# Altium PCB PCB10X10.PcbDoc
Units mm, origin at the board's own origin, x right, y up, seen from the top; angles counter-clockwise.
Board outline 100 x 100 mm, 2 copper layers (Top Layer, Bottom Layer); 43 components, 32 nets, 154 pads, 19 vias.
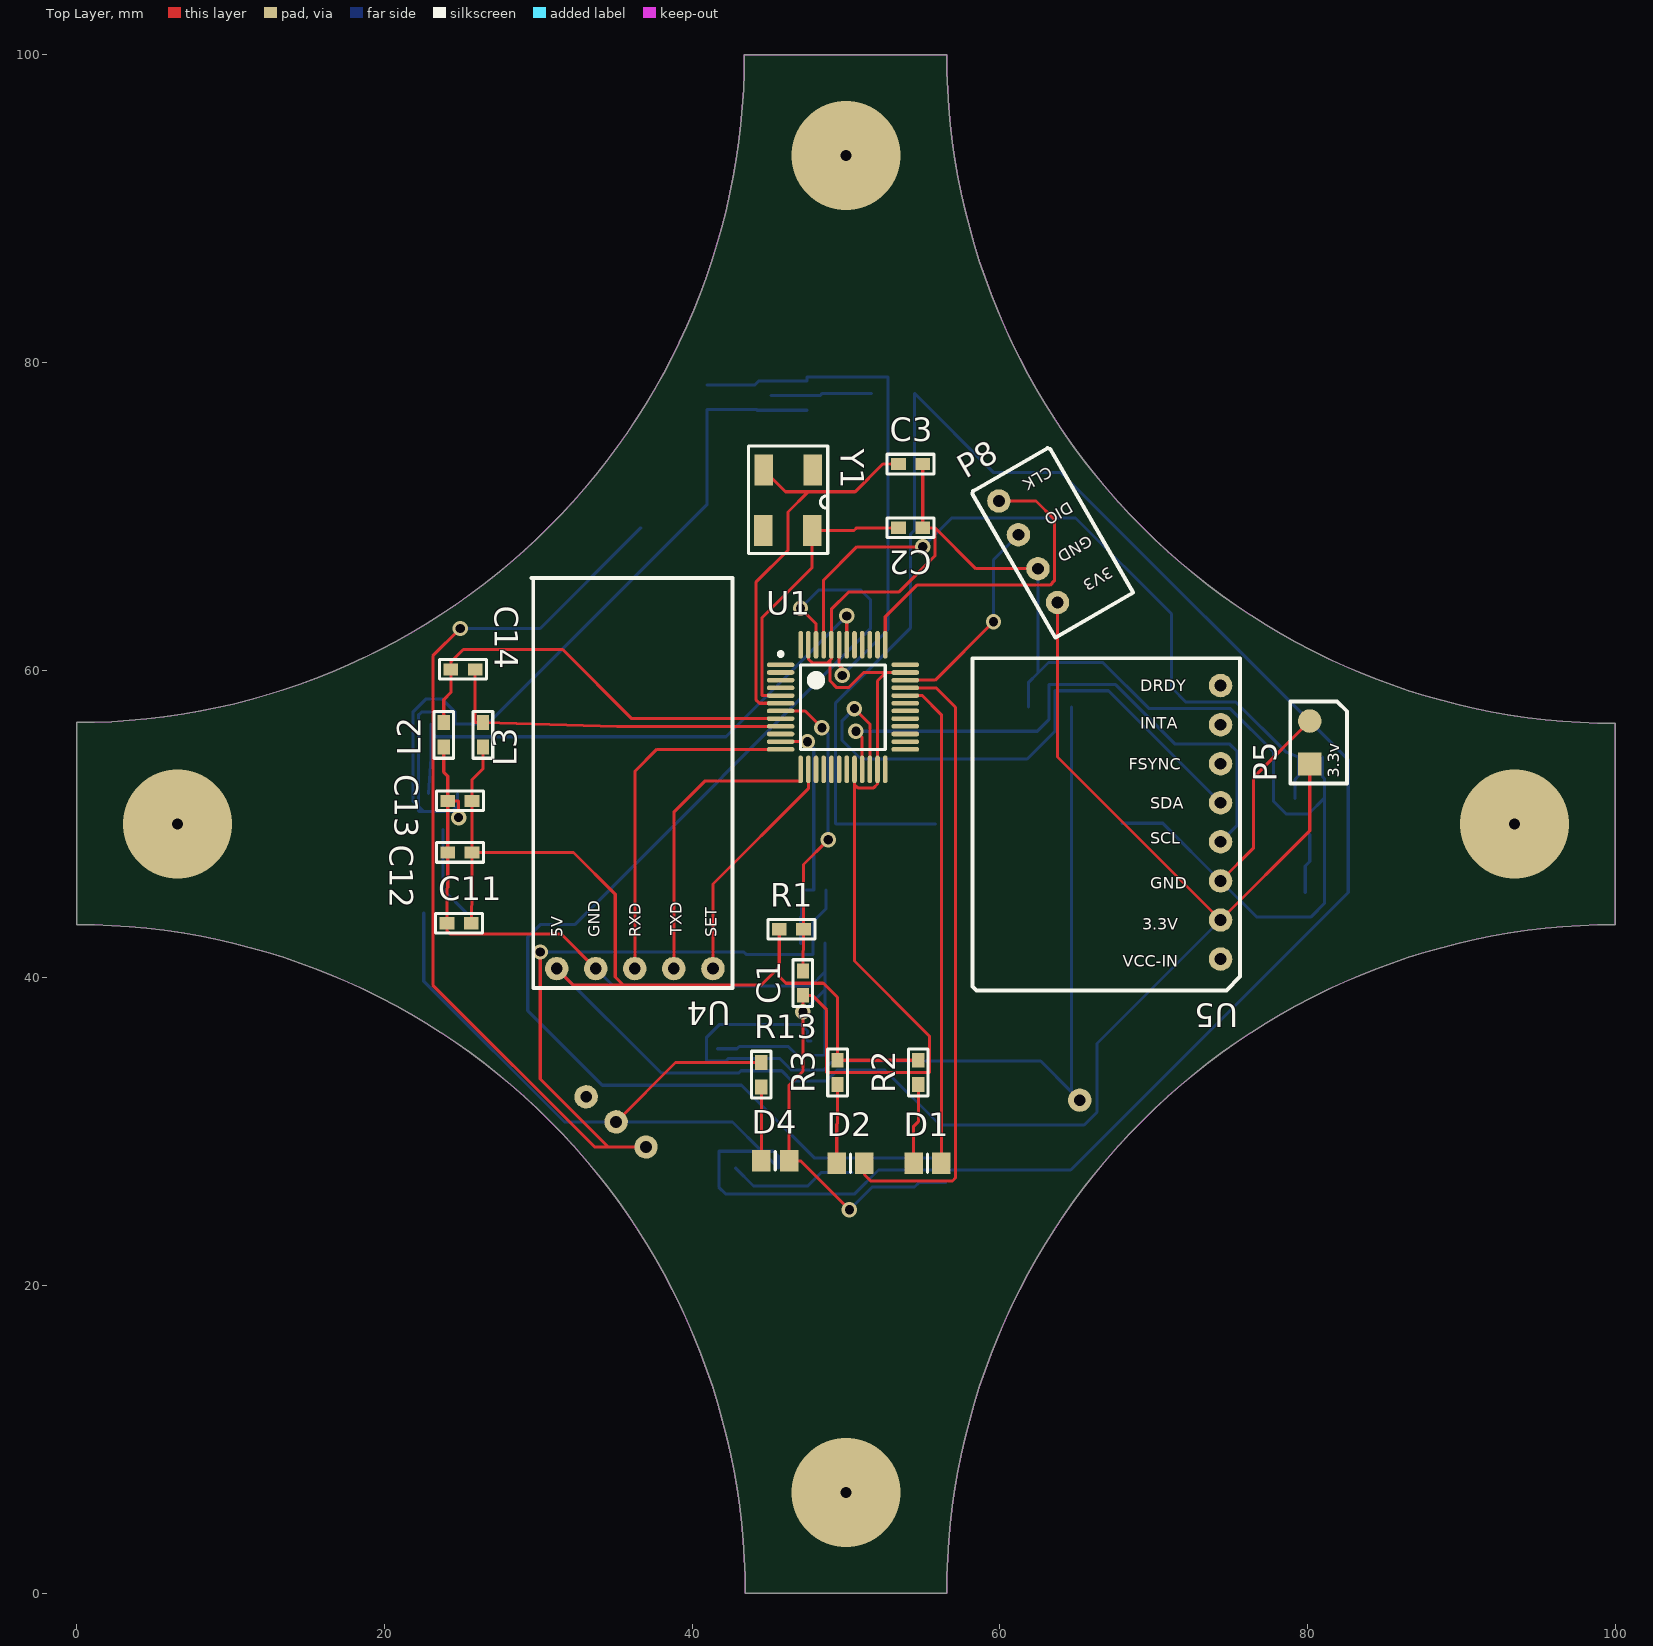
[diagram p0: Top Layer view]
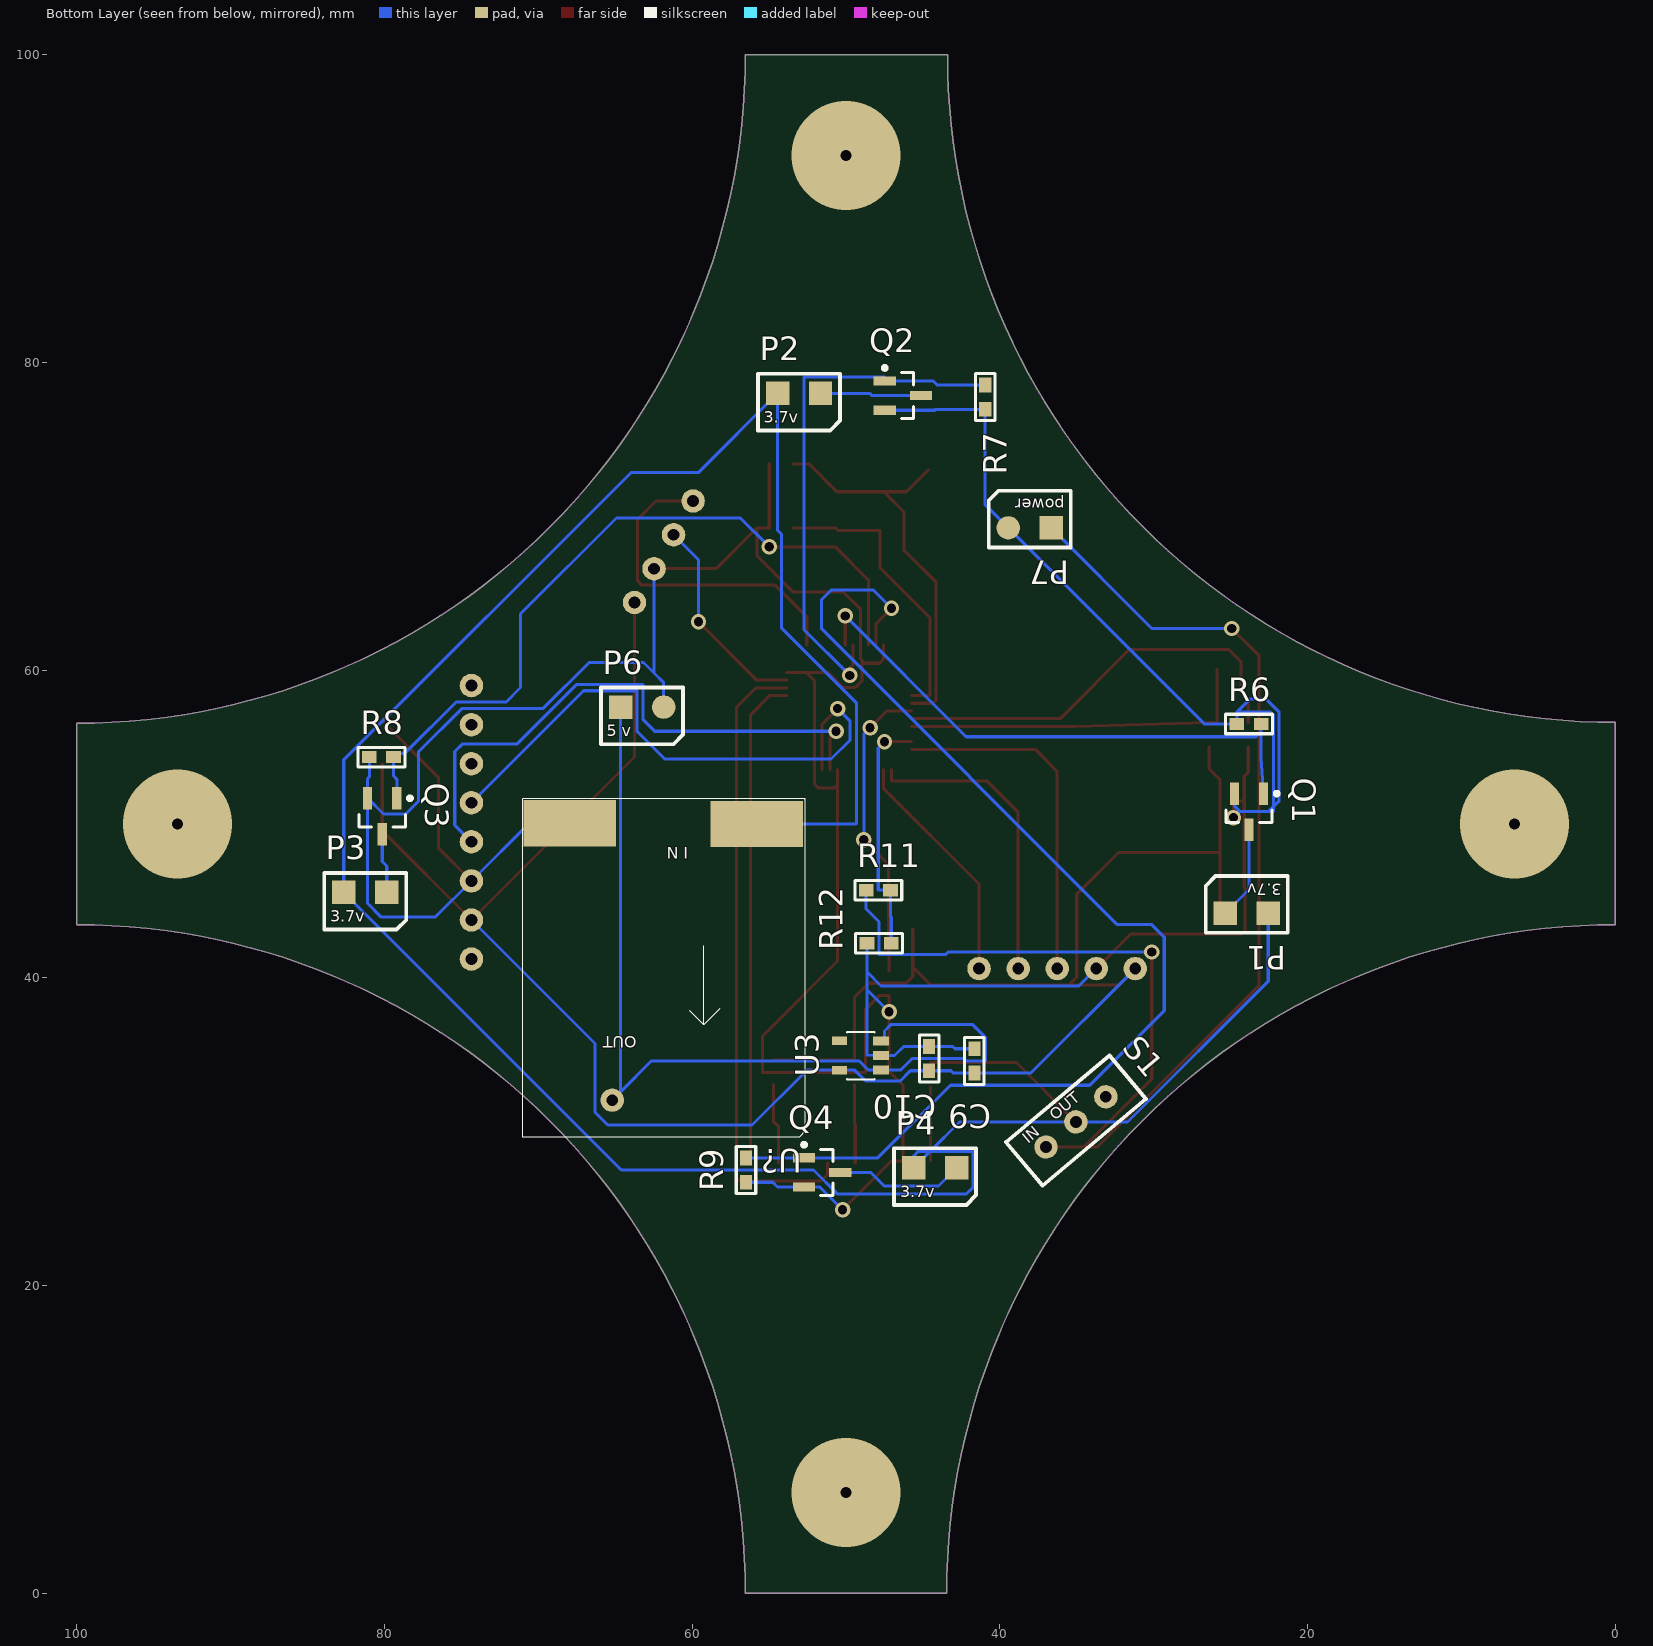
[diagram p1: Bottom Layer view, seen from below]
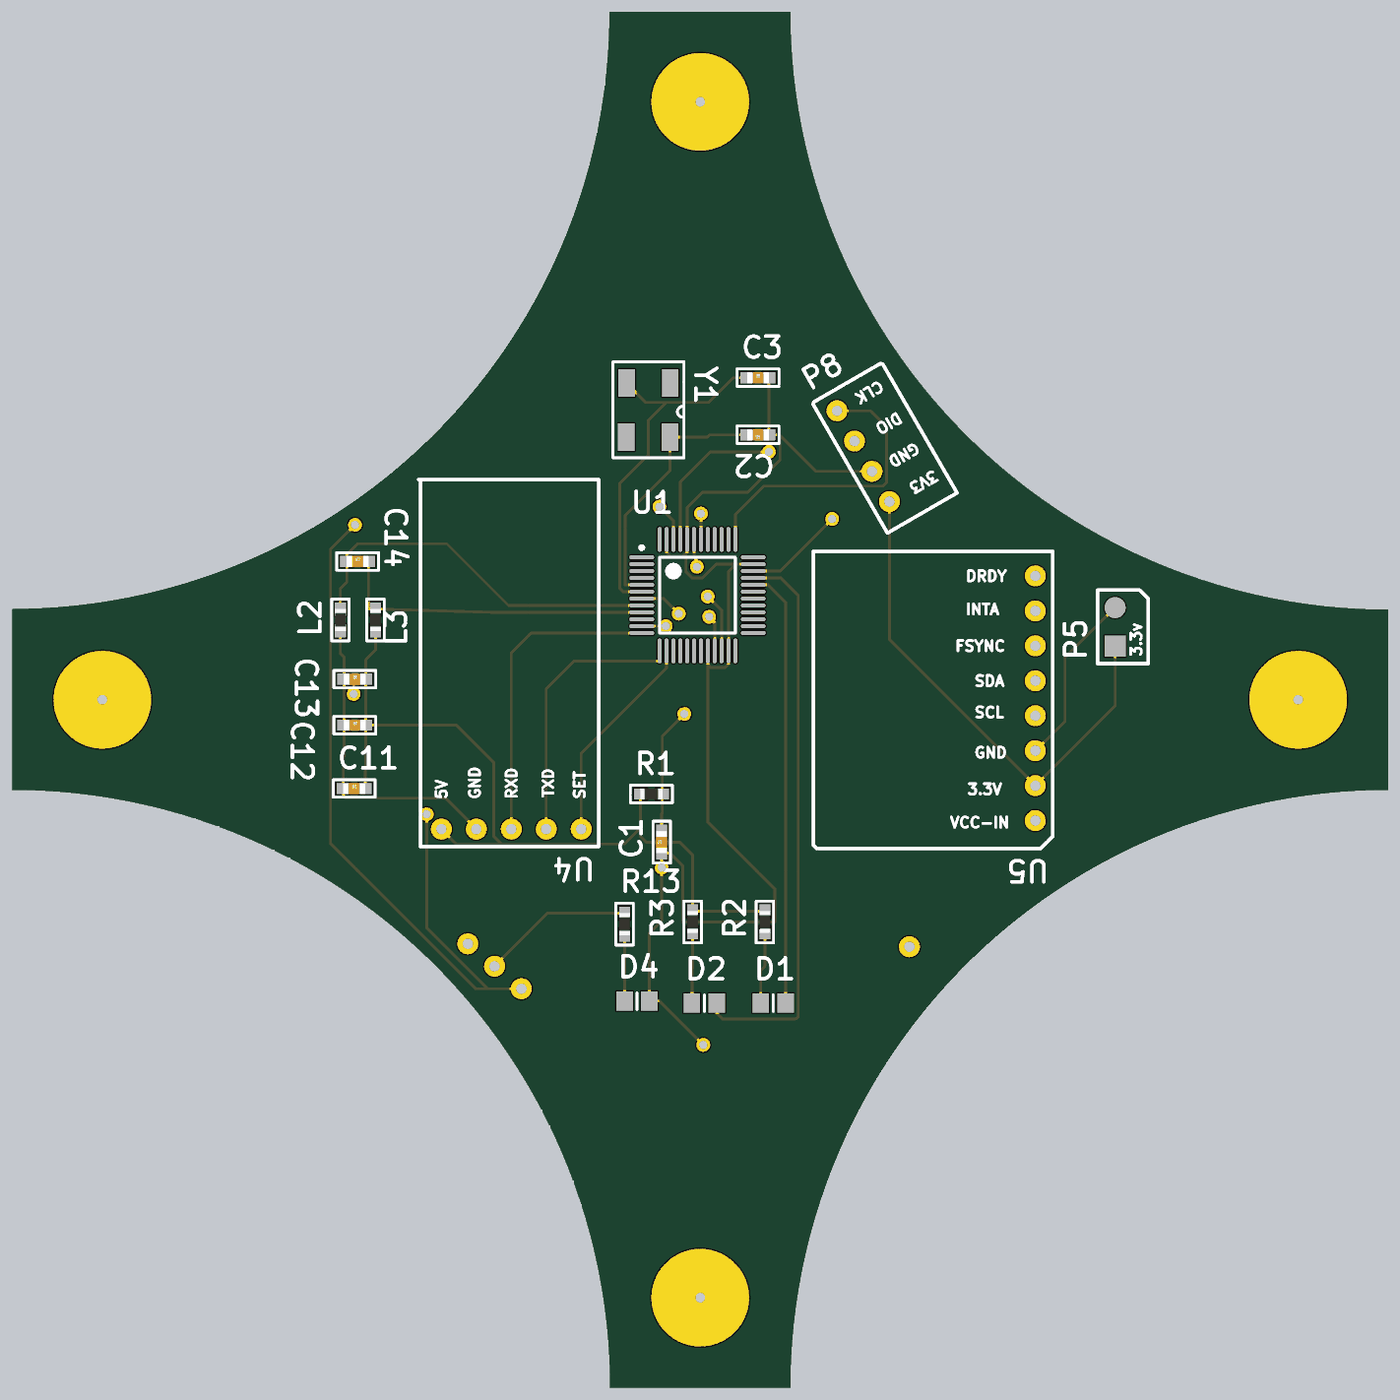
[diagram p2: 3D render of the assembled board from above, using the file's embedded part models]

## Layer stack, top to bottom
Top Solder: solder mask 0.0102, Solder Resist, Dk 3.5
Top Layer: signal copper 0.0356
Dielectric 1: dielectric 0.32, FR-4, Dk 4.8
Bottom Layer: signal copper 0.0356
Bottom Solder: solder mask 0.0102, Solder Resist, Dk 3.5

## Board outline
0,43.45 0,56.6 ccw(c0,100) 43.4,100 56.55,100 ccw(c100,100) 100,56.55 100,43.45 ccw(c100,0) 56.55,0 43.45,0 ccw(c0,0)

## Design rules (kind name [scope] priority, off if disabled: settings)
Clearance [All] p1: gap=0.2
DiffPairsRouting [All] p1: maxlimit=0.2 minlimit=0.2 mostfreqgap=0.2 toplayer_minwidth=0.381 toplayer_maxwidth=0.381 toplayer_prefwidth=0.381 bottomlayer_minwidth=0.381 bottomlayer_maxwidth=0.381 bottomlayer_prefwidth=0.381 maxuncoupledlength=12.7
PolygonConnect [All] p1: connectstyle=Relief reliefconductorwidth=0.254 reliefentries=4 polygonreliefangle="90 Angle" airgapwidth=0.254
RoutingCorners [All] p1: cornerstyle=45-Degree minsetback=2 maxsetback=2
RoutingVias [All] p1: holewidth=0.6 width=1 viastyle="Through Hole" minholewidth=0.711 minwidth=1.27 maxholewidth=0.8 maxwidth=1.5
SolderMaskExpansion [All] p1: expansion=0.102
Width [All] p1: maxlimit=0.5 minlimit=0.2 preferedwidth=0.2
28 further rules are at their usual default settings.

## Components (designator, comment, footprint, x,y, rotation, side; value= is the part's Value field where it differs from the comment)
C1 "Cap" 0603-N-CAP 47.2,39.65 r90 top
C2 "Cap" 0603-N-CAP 54.2,69.25 r180 top
C3 "Cap" 0603-N-CAP 54.2,73.4 r0 top
C9 "Cap" 0603-N-CAP 41.65,34.6 r270 bottom
C10 "Cap" 0603-N-CAP 44.6,34.75 r270 bottom
C11 "Cap" 0603-N-CAP 24.85,43.55 r0 top
C12 "Cap" 0603-N-CAP 24.9,48.15 r0 top
C13 "Cap" 0603-N-CAP 24.9,51.5 r0 top
C14 "Cap" 0603-N-CAP 25.1,60.05 r0 top
D1 "D2" 6-0805_N 55.3,27.95 r0 top
D2 "D2" 6-0805_N 50.3,27.95 r0 top
D4 "D2" 6-0805_N 45.4,28.1 r0 top
L2 "Inductor" "0603-N - res" 23.85,55.8 r90 top
L3 "Inductor" "0603-N - res" 26.4,55.8 r90 top
P1 "motor1" Motor 22.55,44.2 r0 bottom
P2 "motor2" Motor 54.45,78 r180 bottom
P3 "motor3" Motor 82.65,45.55 r180 bottom
P4 "motor4" Motor 45.6,27.65 r180 bottom
P5 "3.3V_GND" 3.3V_GND 80.15,53.9 r90 top
P6 "5V_GND" 5V_GND 64.65,57.6 r180 bottom
P7 "Power_GND" Power_GND 36.656,69.25 r0 bottom
P8 "SW_download" SW_download 63.75,64.4 r120 top
Q1 "SI2302" SOT-23_M 23.8,50.801 r270 bottom
Q2 "SI2302" SOT-23_M 46.3,77.85 r180 bottom
Q3 "SI2302" SOT-23_M 80.15,50.5 r270 bottom
Q4 "SI2302" SOT-23_M 51.55,27.35 r180 bottom
R1 "Res2" "0603-N - res" 46.45,43.15 r0 top
R2 "Res1" "0603-N - res" 54.7,33.85 r90 top
R3 "Res1" "0603-N - res" 49.45,33.85 r90 top
R6 "Res1" "0603-N - res" 23.8,56.5 r180 bottom
R7 "Res1" "0603-N - res" 40.95,77.75 r90 bottom
R8 "Res1" "0603-N - res" 80.2,54.35 r180 bottom
R9 "Res1" "0603-N - res" 56.5,27.5 r90 bottom
R11 "Res1" "0603-N - res" 47.9,45.7 r180 bottom
R12 "Res1" "0603-N - res" 47.85,42.25 r0 bottom
R13 "Res1" "0603-N - res" 44.5,33.7 r90 top
S1 "switch" SWITCH 37,29 r140 bottom
U1 "STM32F101C8T6" LQFP48_N 49.8,57.6 r0 top
U3 "MIC5205" SOT-23_5-001 47.725,34 r90 bottom
U4 "433" 433 41.35,40.6 r180 top
U5 "MPU6050_10" MPU6050_10 74.35,59 r270 top
U? "升压模块" 升压模块 71,51.65 r270 bottom
Y1 "8M" 5032_ 47.8,73.55 r270 top

## Footprints (in the part's own frame and the unit in brackets; to place one, negate y for a bottom-side part, rotate by r counter-clockwise, add the part's x,y. Pads: shape width x height; smd on the part's side, far side on the other; paste and mask are expansions set on the pad)
3.3V_GND [mil]
  rect 60x60 smd: 1(0,0)
  round 60 smd: 2(110,0)
  silkscreen extent -50,-95 160,50
5V_GND [mil]
  rect 60x60 smd: 1(0,0)
  round 60 smd: 2(110,0)
  silkscreen extent -50,-95 160,50
6-0805_N [mm] "Chip Resistor, Body 2.0x1.2mm, IPC Medium Density"
  rect 1.2x1.4 smd: 1(-0.9,0) 2(0.9,0)
  silkscreen extent 0,-0.6 0,0.6, body extent -1.07,-0.7 1.07,0.7, height 0.7
433 [mil]
  round 60 hole 30: 1(0,0) 2(100,0) 3(200,0) 4(300,0) 5(400,0)
  silkscreen extent -50,-1000 465,50
"0603-N - res" [mm]
  rect 0.96x0.8 smd: 1(-0.79,0) 2(0.79,0)
  silkscreen extent -1.52,-0.64 1.52,0.63, body extent -0.8,-0.4 0.8,0.4, height 0.4
0603-N-CAP [mm]
  rect 0.96x0.8 smd: 1(-0.79,0) 2(0.79,0)
  silkscreen extent -1.52,-0.63 1.52,0.64, body extent -0.8,-0.4 0.8,0.4, height 0.3
5032_ [mm]
  rect 2x1.2 smd: 1(0.533,-3.15) 2(4.47,-3.175) 3(4.47,0) 4(0.533,0.025)
  silkscreen extent -1.02,-4.14 5.97,1.02, body extent -0.03,-3.15 5,0.05, height 0.8
LQFP48_N [mm] "Thin QFP, 48-Leads, Body 7x7mm, Pitch 0.5mm, IPC Medium Density"
  oval 1.8x0.3 smd: 1(-4.05,2.75) 2(-4.05,2.25) 3(-4.05,1.75) 4(-4.05,1.25) 5(-4.05,0.75) 6(-4.05,0.25) 7(-4.05,-0.25) 8(-4.05,-0.75) 9(-4.05,-1.25) 10(-4.05,-1.75) 11(-4.05,-2.25) 12(-4.05,-2.75) 25(4.05,-2.75) 26(4.05,-2.25) 27(4.05,-1.75) 28(4.05,-1.25) 29(4.05,-0.75) 30(4.05,-0.25) 31(4.05,0.25) 32(4.05,0.75) 33(4.05,1.25) 34(4.05,1.75) 35(4.05,2.25) 36(4.05,2.75)
  oval 0.3x1.8 smd: 13(-2.75,-4.05) 14(-2.25,-4.05) 15(-1.75,-4.05) 16(-1.25,-4.05) 17(-0.75,-4.05) 18(-0.25,-4.05) 19(0.25,-4.05) 20(0.75,-4.05) 21(1.25,-4.05) 22(1.75,-4.05) 23(2.25,-4.05) 24(2.75,-4.05) 37(2.75,4.05) 38(2.25,4.05) 39(1.75,4.05) 40(1.25,4.05) 41(0.75,4.05) 42(0.25,4.05) 43(-0.25,4.05) 44(-0.75,4.05) 45(-1.25,4.05) 46(-1.75,4.05) 47(-2.25,4.05) 48(-2.75,4.05)
  silkscreen extent -4.17,-2.75 2.75,3.57, body extent -3.5,-3.5 3.5,3.5, height 1.6
Motor [mil]
  rect 60x60 smd: 1(0,0) 2(110,0)
  silkscreen extent -50,-95 160,50
MPU6050_10 [mil] "mpu6050_10轴传感器"
  round 60 hole 30: 0(0,0) 1(100,0) 2(200,0) 3(300,0) 4(400,0) 5(500,0) 6(600,0) 7(700,0)
  silkscreen extent -70,-635 780,50
Power_GND [mil]
  rect 60x60 smd: 1(0,0)
  round 60 smd: 2(110,0)
  silkscreen extent -50,-95 160,50
SOT-23_5-001 [mm]
  rect 0.6x1.05 smd: 1(0,0) 2(0.95,0) 3(1.9,0)
  rect 0.55x1 smd: 4(1.9,2.7) 5(0,2.7)
  silkscreen extent -0.61,0.42 2.49,2.22, body extent -0.49,0 2.41,2.8, height 1.09
SOT-23_M [mm] "SOT23, 3-Leads, Body 2.9x1.3mm, Pitch 0.95mm, Lead Span 2.3mm, IPC Low Density"
  rect 1.45x0.6 smd: 1(-1.175,0.95) 2(-1.175,-0.95) 3(1.175,0)
  silkscreen extent -1.3,-1.5 0.7,1.92, body extent -0.7,-1.5 0.7,1.5, height 1.11
SW_download [mil]
  round 60 hole 30: 1(0,0) 2(100,0) 3(200,0) 4(300,0)
  silkscreen extent -75,-180 355,50
SWITCH [mil]
  round 60 hole 30: 1(0,0) 2(100,0) 3(200,0)
  silkscreen extent -70,-70 275,75
升压模块 [mm] "升到5V"
  round 1.524 hole 0.762: 0(19.6,5.8)
  rect 3x6 smd: 1(1.65,15.2) 2(1.6,3.05)
  silkscreen extent 0,0 22,18.35

## Part data
C1 C2 C3 C9 C10 C11 C12 C13 C14: "Capacitor"
D1 D2 D4: library part LED3, "Typical BLUE SiC LED"
P1 P2 P3 P4: library part motor, "电机连接口"
Q1 Q2 Q3 Q4: library part IRLML2402, "HEXFET Power MOSFET"
R1 R2 R3 R6 R7 R8 R9 R11 R12 R13: "Resistor"
U1: "STM32 ARM-based 32-bit MCU with 64 Kbytes Flash, 48-pin LQFP, Industrial Temperature"
U3: "5V降压到3.3V"
U4: "通讯模块"
U5: library part MPU6050, "MPU6050_10轴"
U?: "升压到5V"
Y1: library part XTAL, "Crystal Oscillator"

## Via types
v1: diameter 1, hole 0.6, Top Layer to Bottom Layer, 15 vias
v2: diameter 7.1, hole 0.711, Top Layer to Bottom Layer, 4 vias

## Nets (pads, with @x,y where several pads share a name; then routed paths per layer and width w, separated by ;. In a path a pad name is that pad's centre, name@x,y a point inside that pad or via, vN(x,y) a via of type N, cw(c..) or ccw(c..) an arc to the next point about the centre after c; other vN are vias at no path point)
3.3V: C9.2 C10.2 C11.2 C12.2 C13.2 L3.1 P5.1 P8.1 R1.1 R2.2 R3.2 U3.5 U4.5 U5.6 | length 154.3
  Top Layer w0.2: C11.2 25.69,45.869 C12.2 ; L3.1 26.4,53.591 25.69,52.881 C13.2 C12.2 ; U4.5 32.27,39.52 35.532,39.52 ; R1.1 45.66,40.707 ; R2.2 R3.2 49.45,38.734 48.537,39.647 46.099,39.647 45.66,40.086 45.66,40.707 ; P8.1 63.75,54.36 U5.6 80.15,49.56 P5.1 ; C12.2 32.287,48.15 34.999,45.438 34.999,40.054 35.532,39.52 ; 35.532,39.52 44.473,39.52 45.66,40.707
  Bottom Layer w0.2: U4.5 37.98,33.81 C9.2 43.025,33.81 43.175,33.96 C10.2 45.817,33.96 46.48,33.297 48.723,33.297 49.426,34 U3.5 52.533,34 56.106,30.427 65.479,30.427 66.317,31.265 66.317,35.727 U5.6
3.7V: P7.1 R11.1 S1.1 | length 93.4
  Top Layer w0.2: v1(24.915,62.71) 23.137,60.932 23.137,39.52 33.657,29 34.546,29 ; v1(30.122,41.679) 30.122,33.424 34.546,29 ; S1.1 34.546,29
  Bottom Layer w0.2: v1(24.915,62.71) 30.116,62.71 P7.1 ; v1(30.122,41.679) 43.356,41.679 43.508,41.527 47.851,41.527 47.851,43.635 48.69,44.474 R11.1
3.7VOUT: P1.1 P2.1 P3.1 P4.1 R13.2 S1.2 U?.1 | length 183.1
  Top Layer w0.2: S1.2 38.912,34.49 R13.2
  Bottom Layer w0.2: P1.1 22.55,39.777 31.695,30.633 S1.2 42.617,30.633 44.525,28.725 ; U?.1 49.35,50 49.325,50.025 49.325,57.876 54.18,62.731 54.18,68.822 54.45,69.092 P2.1 59.605,72.845 63.98,72.845 82.65,54.175 P3.1 64.606,27.506 52.119,27.506 50.569,25.957 42.162,25.957 41.73,26.388 41.73,28.725 44.525,28.725 ; 44.525,28.725 P4.1 45.6,28.42 45.295,28.725 44.525,28.725
5V: P6.1 U3.1 U3.3 U?.0 | length 60.4
  Bottom Layer w0.2: U3.3 47.496,35.9 47.496,36.548 47.089,36.955 41.755,36.955 40.943,36.142 40.943,34.593 42.187,34.593 42.34,34.745 45.709,34.745 46.454,34 U3.1 48.537,34 49.13,34.593 62.657,34.593 64.65,32.6 ; P6.1 64.65,32.6 ; U?.0 64.65,32.6
BUZZER: U1.15
GND: C1.1 C2.1 C3.2 C9.1 C10.1 C11.1 C12.1 C13.1 D4.2 L2.1 P5.2 P6.2 P7.2 P8.2 Q1.2 Q2.2 Q3.2 Q4.2 R6.1 R7.1 R8.1 R9.1 R12.2 U1.20 U1.23 U1.35 U1.44 U1.47 U3.2 U4.4 U5.5 U?.2 | length 291.1
  Top Layer w0.2: L2.1 23.85,53.369 24.11,53.109 C13.1 ; v1(24.814,50.417) 24.814,51.5 C13.1 ; U4.4 31.482,42.848 24.263,42.848 24.06,43.051 C11.1 24.06,45.819 24.11,45.869 C12.1 C13.1 ; U1.47 47.55,60.729 47.829,60.45 48.771,60.45 48.956,60.636 ; v1(50.223,24.915) 47.039,28.1 D4.2 46.3,33.018 47.2,33.918 v1(47.2,37.793) C1.1 47.8,38.86 48.74,37.92 48.74,33.856 55.421,33.856 55.421,36.218 50.55,41.089 50.55,52.57 ; U1.20 50.55,52.57 ; U1.35 52.593,59.85 ; C3.2 C2.1 55.789,69.25 ; P8.2 58.439,66.6 55.789,69.25 ; U5.5 76.503,48.453 76.503,53.047 P5.2 ; 48.956,60.636 48.956,59.307 49.401,58.862 50.161,58.862 51.148,59.85 52.593,59.85 ; 48.956,60.636 49.05,60.729 U1.44 49.05,63.959 50.163,65.071 53.425,65.071 55.789,67.435 55.789,69.25 ; 50.55,52.57 50.772,52.347 51.796,52.347 52.05,52.601 U1.23 52.05,59.307 52.593,59.85
  Bottom Layer w0.2: Q1.2 24.75,51.179 24.394,50.823 ; v1(24.814,50.417) 24.407,50.823 24.394,50.823 ; U4.4 34.861,39.469 47.724,39.469 48.64,40.385 ; C9.1 42.914,35.39 43.064,35.54 C10.1 46.256,35.54 46.846,34.95 U3.2 48.64,34.977 48.64,39.233 ; v1(47.2,37.793) 48.64,39.233 ; Q2.2 44.228,76.9 44.168,76.96 R7.1 40.95,70.75 P7.2 26.687,56.487 26.675,56.5 R6.1 24.59,57.072 ; R12.2 48.64,40.385 ; v1(50.223,24.915) 51.708,26.4 Q4.2 54.455,26.4 54.765,26.71 R9.1 ; P6.2 61.856,59.189 62.48,59.813 ; P8.2 62.48,59.813 ; U?.2 70.6,50.05 U5.5 76.685,43.965 80.236,43.965 81.1,44.829 Q3.2 ; R8.1 80.99,53.067 81.1,52.957 Q3.2 ; 22.197,51.153 22.197,57.072 22.401,57.275 24.387,57.275 24.59,57.072 ; 22.197,51.153 22.197,50.874 22.248,50.823 22.528,50.823 ; 22.197,51.153 22.528,50.823 ; 22.197,51.153 21.842,51.509 21.842,57.275 22.68,58.113 23.752,58.113 24.59,57.275 24.59,57.072 ; 22.528,50.823 24.394,50.823 ; 48.64,39.233 48.64,40.385 ; 62.48,59.813 63.168,60.501 66.698,60.501 69.677,57.522 74.953,57.522 77.798,54.677 77.798,51.458 78.611,50.645 80.07,50.645 Q3.2
IIC2_SCL: U1.21 U5.4 | length 38.2
  Top Layer w0.2: v1(50.644,56.03) 51.05,55.624 U1.21
  Bottom Layer w0.2: v1(50.644,56.03) 62.431,56.03 63.188,56.787 63.188,59.062 67.527,59.062 71.397,55.192 74.953,55.192 75.436,54.709 75.436,49.926 U5.4
IIC2_SDA: U1.22 U5.3 | length 38.3
  Top Layer w0.2: v1(50.544,57.503) 51.55,56.497 U1.22
  Bottom Layer w0.2: v1(50.544,57.503) 49.73,56.69 49.73,55.467 50.976,54.221 61.779,54.221 63.588,56.03 63.588,58.662 67.068,58.662 U5.3
LED_GRE: D2.2 U1.33 | length 41.3
  Top Layer w0.2: D2.2 51.2,27.201 51.606,26.795 56.919,26.795 57.122,26.998 57.122,57.58 55.852,58.85 U1.33
LED_RED: D1.2 U1.32 | length 32
  Top Layer w0.2: U1.32 54.955,58.35 56.2,57.105 D1.2
NetC1_2: C1.2 R1.2 U1.7 | length 19.8
  Top Layer w0.2: U1.7 47.344,57.35 v1(48.436,56.259) ; C1.2 47.2,41.755 47.24,41.795 R1.2 47.24,47.367 v1(48.842,48.969)
  Bottom Layer w0.2: v1(48.436,56.259) 48.842,55.852 v1(48.842,48.969)
NetC2_2: C2.2 U1.5 Y1.3 | length 19
  Top Layer w0.2: U1.5 44.549,58.35 44.549,63.422 47.8,66.672 Y1.3 50.518,69.08 50.689,69.25 C2.2
NetC3_1: C3.1 U1.6 Y1.1 | length 26.7
  Top Layer w0.2: Y1.1 46.067,71.6 47.547,71.6 ; U1.6 44.381,57.85 44.143,58.088 44.143,65.708 46.226,67.79 46.226,70.28 47.547,71.6 ; C3.1 52.394,73.4 50.595,71.6 47.547,71.6
NetD1_1: D1.1 R2.1 | length 5.2
  Top Layer w0.2: D1.1 54.4,30.351 54.7,30.651 R2.1
NetD2_1: D2.1 R3.1 | length 5.1
  Top Layer w0.2: D2.1 49.4,30.478 49.45,30.528 R3.1
NetD4_1: D4.1 R13.1 | length 4.8
  Top Layer w0.2: D4.1 R13.1
NetP1_2: P1.2 Q1.3 | length 6.1
  Bottom Layer w0.2: Q1.3 23.8,45.744 P1.2
NetP2_2: P2.2 Q2.3 | length 6.6
  Bottom Layer w0.2: Q2.3 48.309,77.85 48.459,78 P2.2
NetP3_2: P3.2 Q3.3 | length 3.9
  Bottom Layer w0.2: P3.2 79.856,47.267 80.15,47.561 Q3.3
NetP4_2: P4.2 Q4.3 | length 8.4
  Bottom Layer w0.2: P4.2 43.991,26.465 47.521,26.465 48.407,27.35 Q4.3
PWR: R11.2 R12.1 U1.11 | length 15.8
  Top Layer w0.2: U1.11 v1(47.496,55.35)
  Bottom Layer w0.2: R12.1 47.06,43.94 47.11,43.99 R11.2 47.902,45.7 47.902,54.944 v1(47.496,55.35)
RX2_433: U1.13 U4.2 | length 20
  Top Layer w0.2: U4.2 38.81,50.772 40.842,52.804 47.05,52.804 U1.13
SET_433: U1.14 U4.1 | length 15.5
  Top Layer w0.2: U4.1 41.35,46.1 47.55,52.3 U1.14
SWCLK: P8.4 U1.37 | length 21.9
  Top Layer w0.2: U1.37 52.55,63.472 54.607,65.53 63.269,65.53 63.549,65.809 63.549,69.805 62.355,70.999 P8.4
SWDIO: P8.3 U1.34 | length 13.6
  Top Layer w0.2: U1.34 55.794,59.35 v1(59.586,63.142)
  Bottom Layer w0.2: v1(59.586,63.142) 59.586,67.176 P8.3
T4PWM1: Q1.1 R6.2 U1.42 | length 36.8
  Top Layer w0.2: U1.42 v1(50.05,63.529)
  Bottom Layer w0.2: Q1.1 23.01,54.311 23.01,56.005 ; R6.2 23.01,56.005 ; v1(50.05,63.529) 42.195,55.675 23.34,55.675 23.01,56.005
T4PWM2: Q2.1 R7.2 U1.43 | length 34.9
  Top Layer w0.2: U1.43 49.55,60.326 49.756,60.12 v1(49.756,59.662)
  Bottom Layer w0.2: R7.2 44.067,78.54 44.327,78.8 Q2.1 47.475,79.068 52.728,79.068 52.728,62.634 v1(49.756,59.662)
T4PWM3: Q3.1 R8.2 U1.45 | length 48.7
  Top Layer w0.2: U1.45 48.55,65.86 50.709,68.019 v1(54.989,68.019)
  Bottom Layer w0.2: v1(54.989,68.019) 56.868,69.899 64.92,69.899 71.156,63.662 71.156,58.874 72.108,57.922 75.36,57.922 78.611,54.671 R8.2 79.41,53.116 79.2,52.906 Q3.1
T4PWM4: Q4.1 R9.2 U1.46 | length 76.5
  Top Layer w0.2: v1(47.039,64.031) 48.05,63.02 U1.46
  Bottom Layer w0.2: v1(47.039,64.031) 48.207,65.2 50.976,65.2 51.585,64.59 51.585,62.685 32.357,43.457 30.122,43.457 29.309,42.644 29.309,37.869 34.161,33.018 43.21,33.018 47.928,28.3 Q4.1 54.582,28.3 54.592,28.29 R9.2
TX2_433: U1.12 U4.3 | length 22.9
  Top Layer w0.2: U4.3 36.27,53.415 37.705,54.85 U1.12
VDDA: C14.2 L3.2 U1.9 | length 23.3
  Top Layer w0.2: C14.2 25.89,56.59 L3.2 35.102,56.35 U1.9
VSSA: C14.1 L2.2 U1.8 | length 27.8
  Top Layer w0.2: L2.2 23.85,58.088 24.31,58.548 C14.1 24.31,60.526 25.123,61.339 31.577,61.339 36.066,56.85 U1.8
pads on no net: S1.3 U1.1 U1.2 U1.3 U1.4 U1.10 U1.16 U1.17 U1.18 U1.19 U1.24 U1.25 U1.26 U1.27 U1.28 U1.29 U1.30 U1.31 U1.36 U1.38 U1.39 U1.40 U1.41 U1.48 U3.4 U5.0 U5.1 U5.2 U5.7 Y1.2 Y1.4
copper on no net:
  other v2: 50,6.55 6.55,50 93.45,50 50,93.45

## Keep-outs
Keep-Out Layer:
  the board outline again, w0.05

## Text inside footprints (layer, text, board x,y; h text height)
P1: Bottom Overlay "3.7v" at 21.661,46.105 h0.76 r180
P2: Bottom Overlay "3.7v" at 55.339,76.095 h0.76
P3: Bottom Overlay "3.7v" at 83.539,43.645 h0.76
P4: Bottom Overlay "3.7v" at 46.489,25.745 h0.76
P5: Top Overlay "3.3v" at 82.055,53.011 h0.76 r90
P6: Bottom Overlay "5 v" at 65.539,55.695 h0.76
P7: Bottom Overlay "power" at 35.767,71.155 h0.76 r180
P8: Top Overlay "3V3" at 67.079,66.762 h0.76 r210; Top Overlay "GND" at 65.763,68.788 h0.76 r210; Top Overlay "DIO" at 64.493,70.988 h0.76 r210; Top Overlay "CLK" at 63.159,73.298 h0.76 r210
S1: Bottom Overlay "IN" at 38.155,29.191 h0.76 r320; Bottom Overlay "OUT" at 36.404,30.661 h0.76 r320
U4: Top Overlay "5V" at 31.571,42.632 h0.76 r90; Top Overlay "GND" at 33.984,42.632 h0.76 r90; Top Overlay "RXD" at 36.651,42.632 h0.76 r90; Top Overlay "TXD" at 39.318,42.759 h0.76 r90; Top Overlay "SET" at 41.604,42.632 h0.76 r90
U5: Top Overlay "DRDY" at 69.143,58.619 h0.76; Top Overlay "INTA" at 69.143,56.206 h0.76; Top Overlay "FSYNC" at 68.381,53.539 h0.76; Top Overlay "SDA" at 69.778,50.999 h0.76; Top Overlay "SCL" at 69.778,48.713 h0.76; Top Overlay "GND" at 69.778,45.792 h0.76; Top Overlay "3.3V" at 69.27,43.125 h0.76; Top Overlay "VCC-IN" at 68,40.712 h0.76
U?: Bottom Overlay "I N" at 60.25,48.5 h0.76 r180; Bottom Overlay "OUT" at 63.6,36.2 h0.76 r180